# Altium PCB PCB.PcbDoc
Units mil, origin at the board's own origin, x right, y up, seen from the top; angles counter-clockwise.
Board outline 3935 x 3935 mil, 4 copper layers (Top Layer, GNDL, PWRL, Bottom Layer), stack 23.756 mil thick; 34 components, 78 nets, 340 pads, 278 vias.
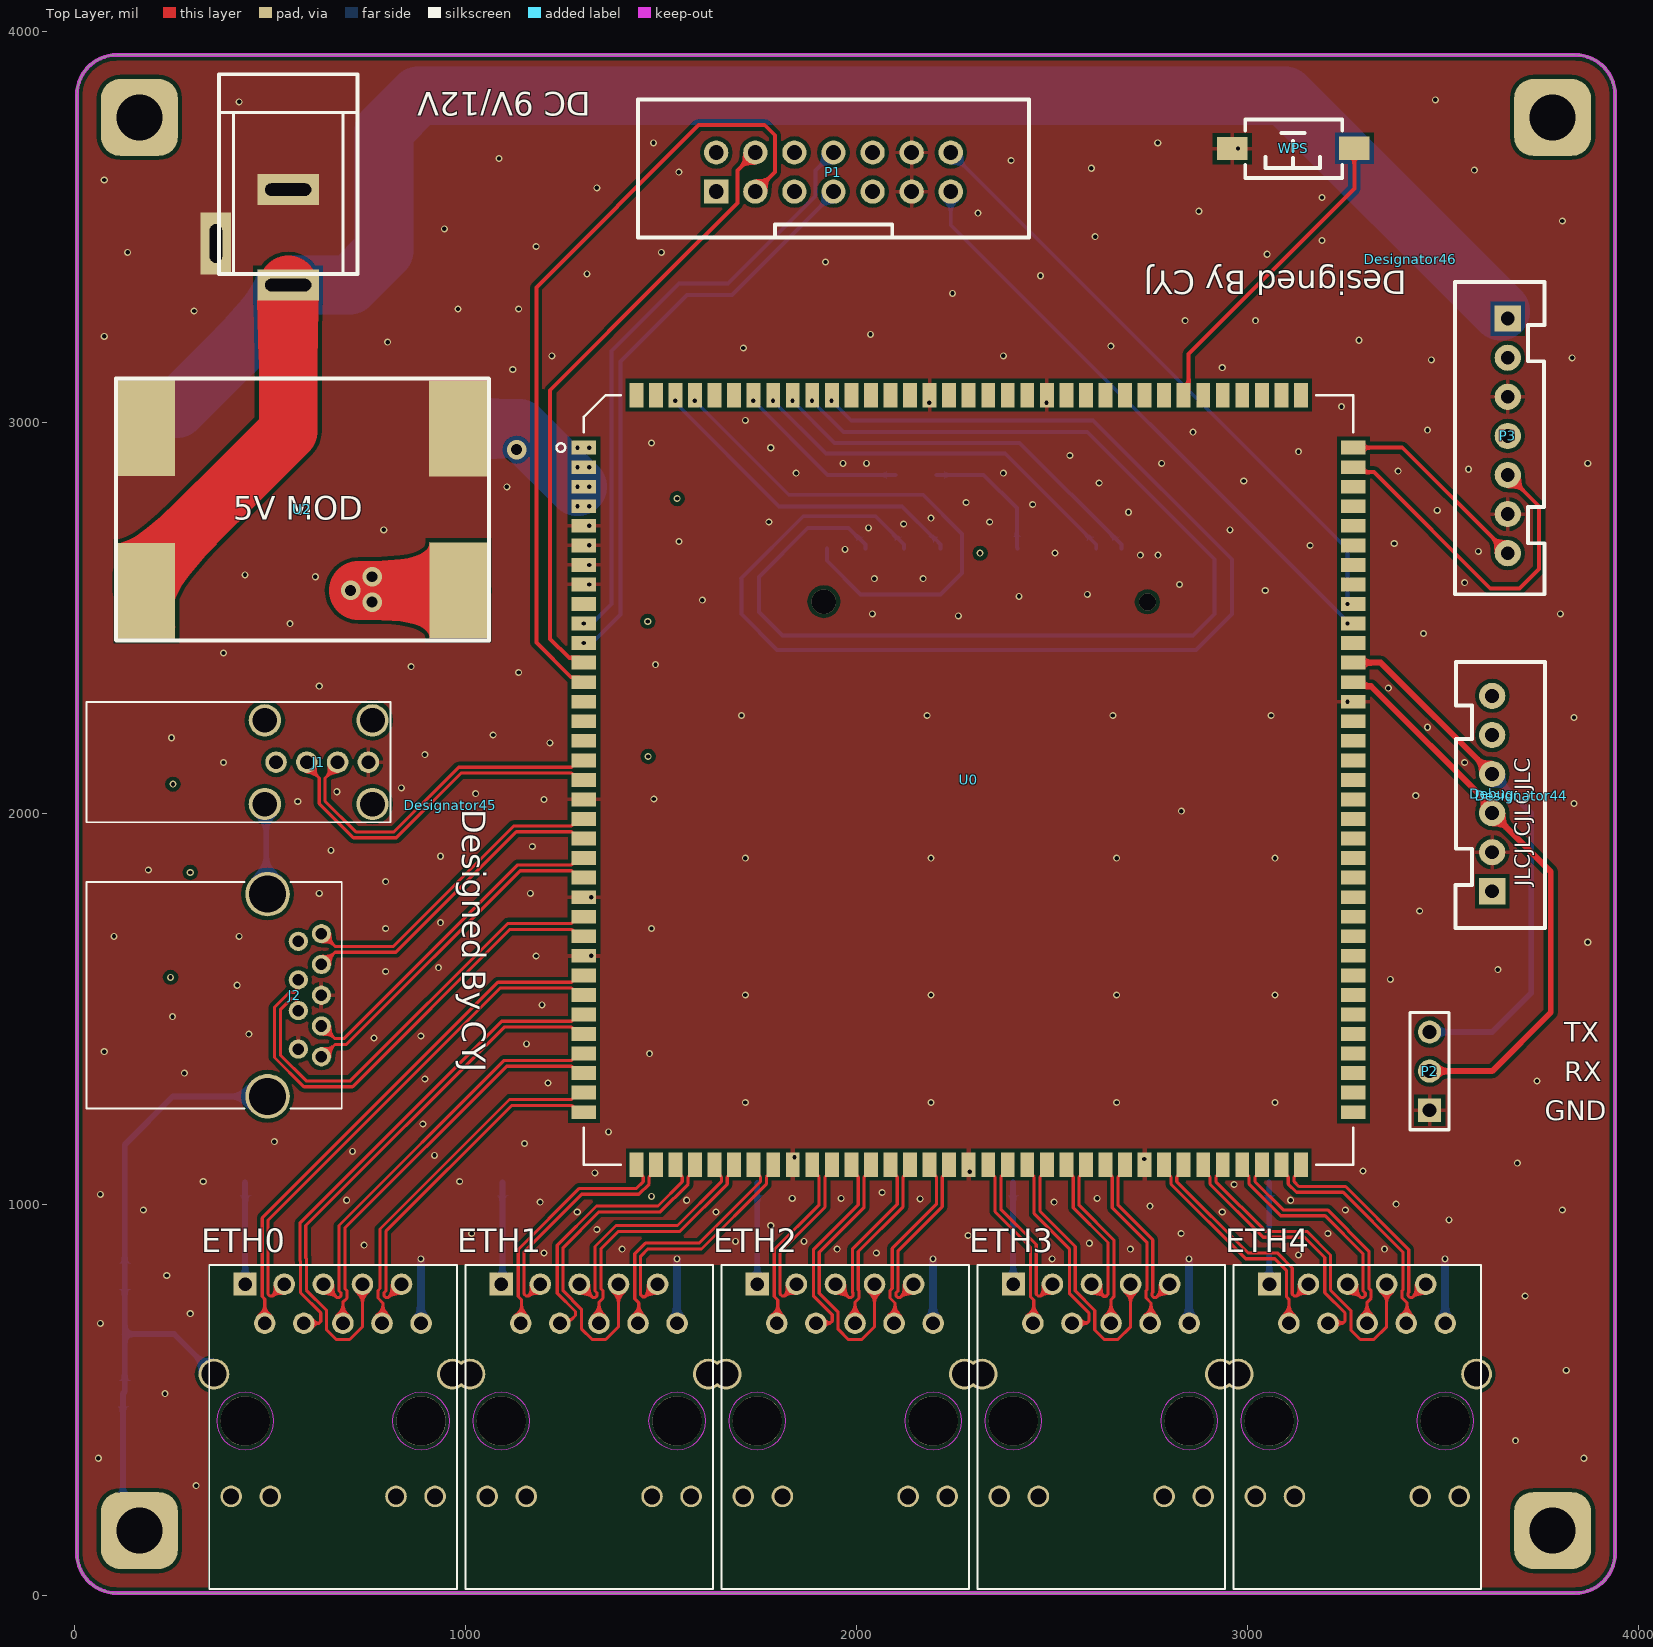
[diagram p0: Top Layer view]
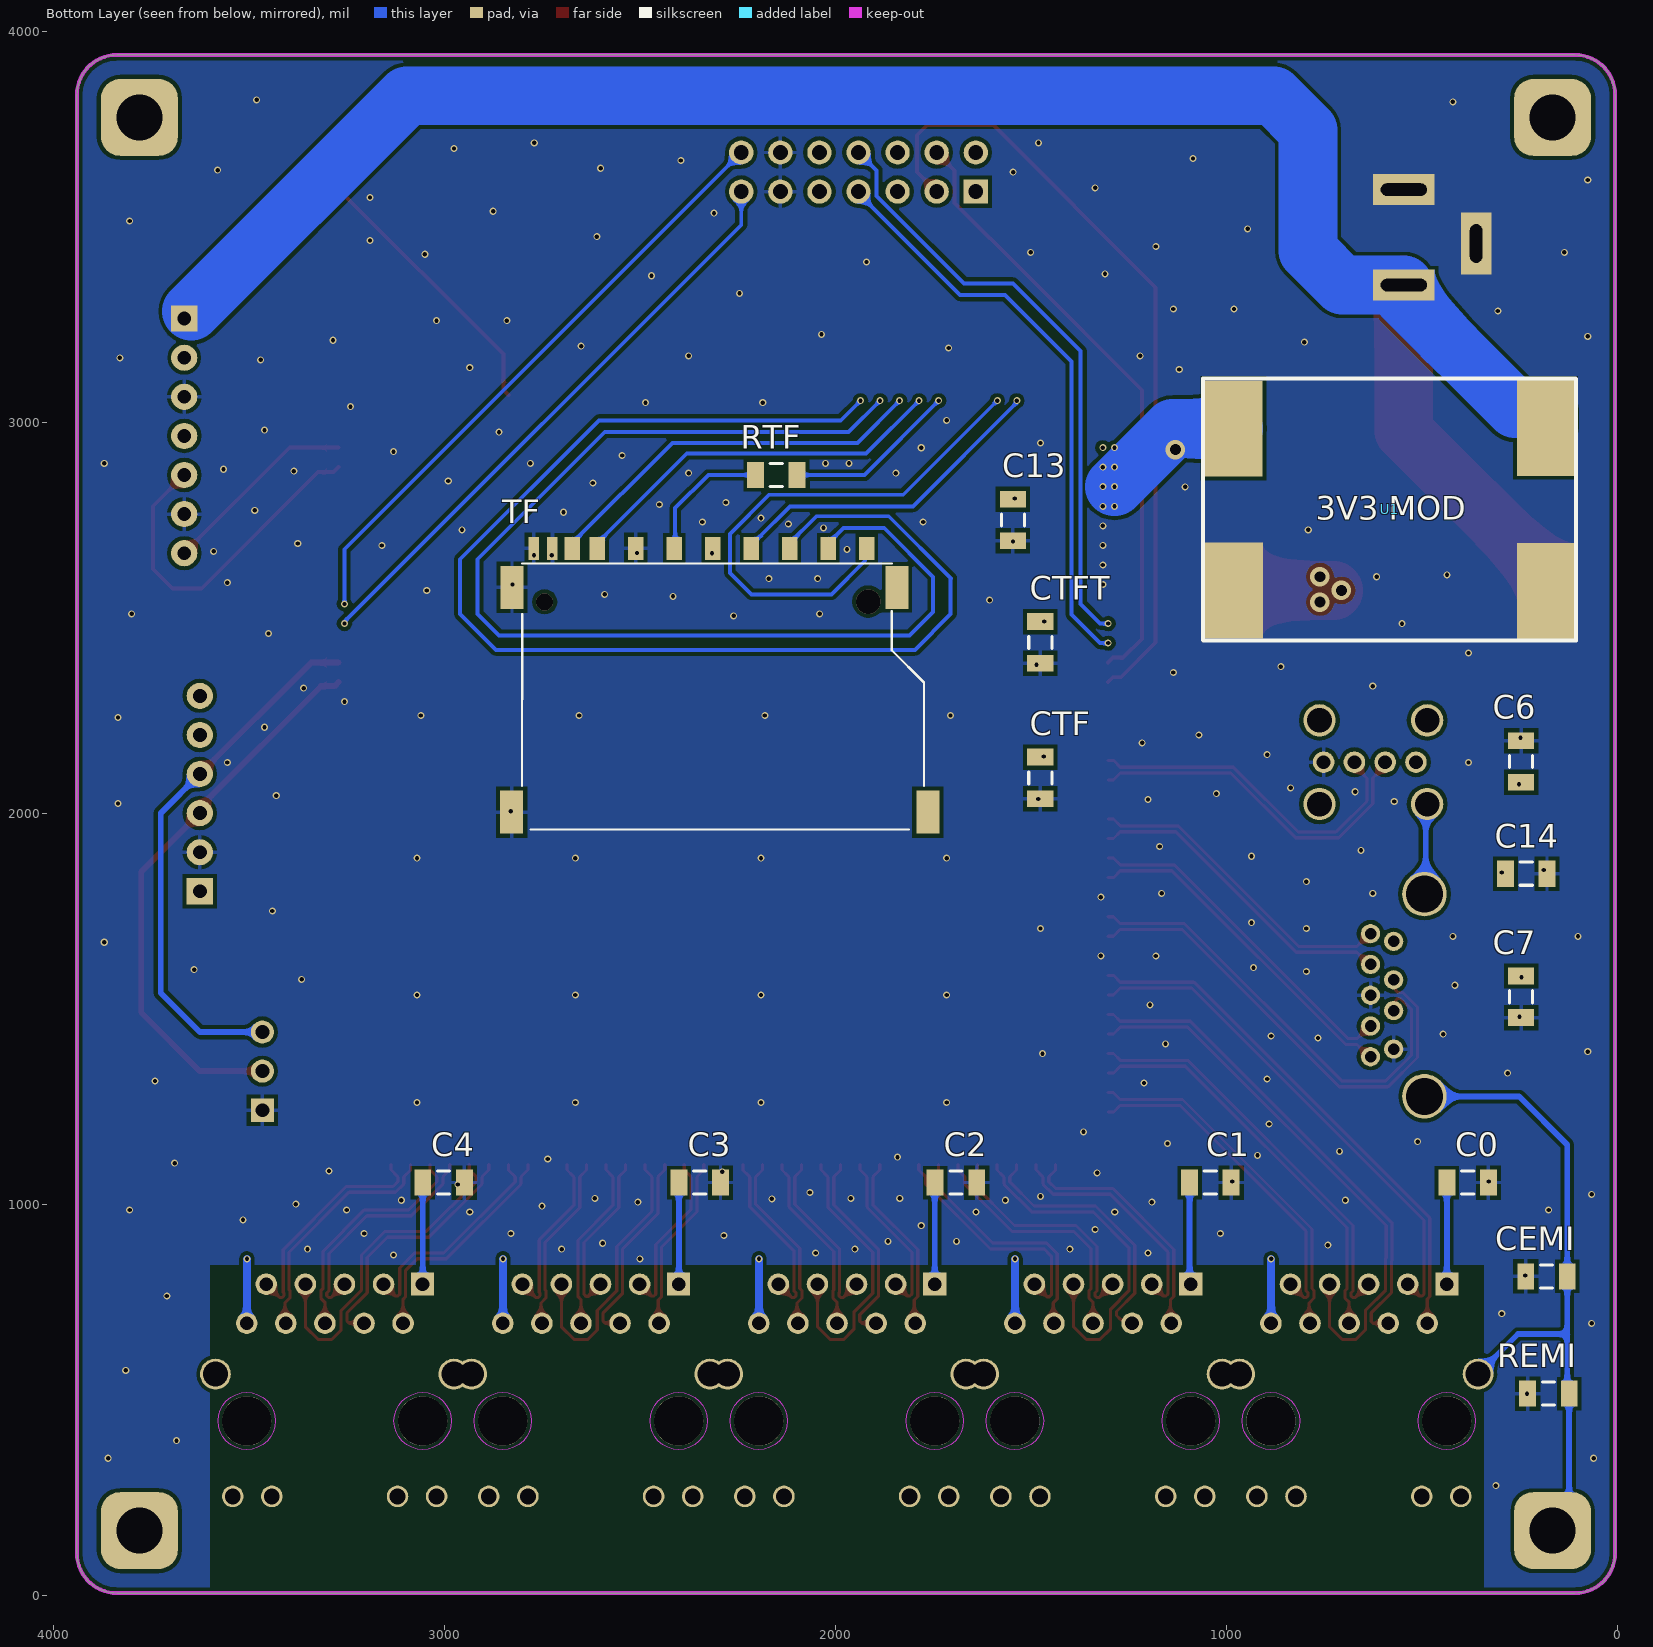
[diagram p1: Bottom Layer view, seen from below]
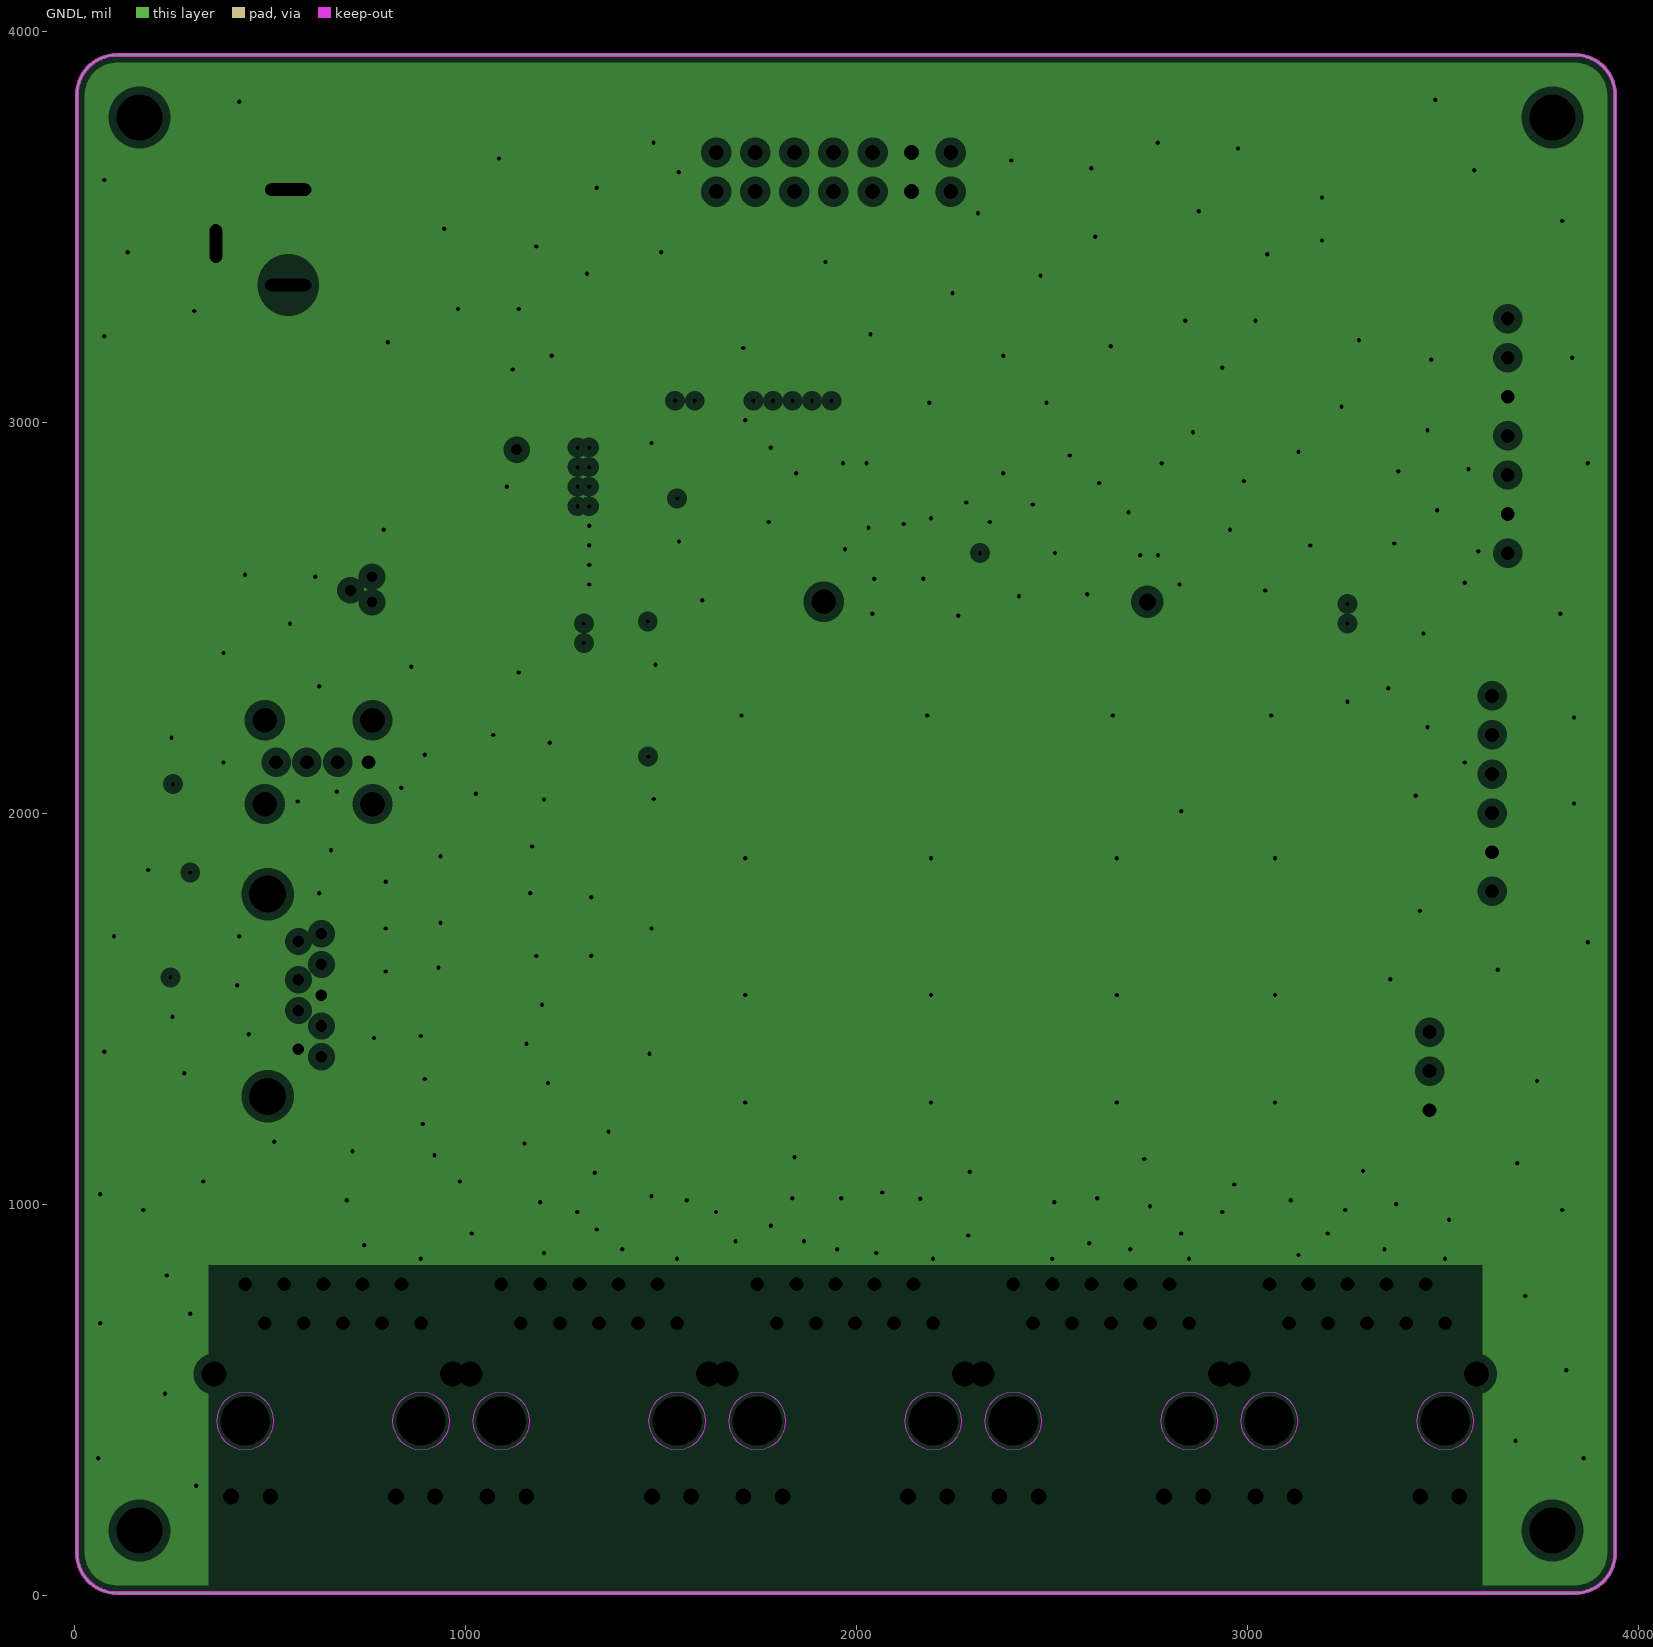
[diagram p2: GNDL, clearances drawn from the general rule]
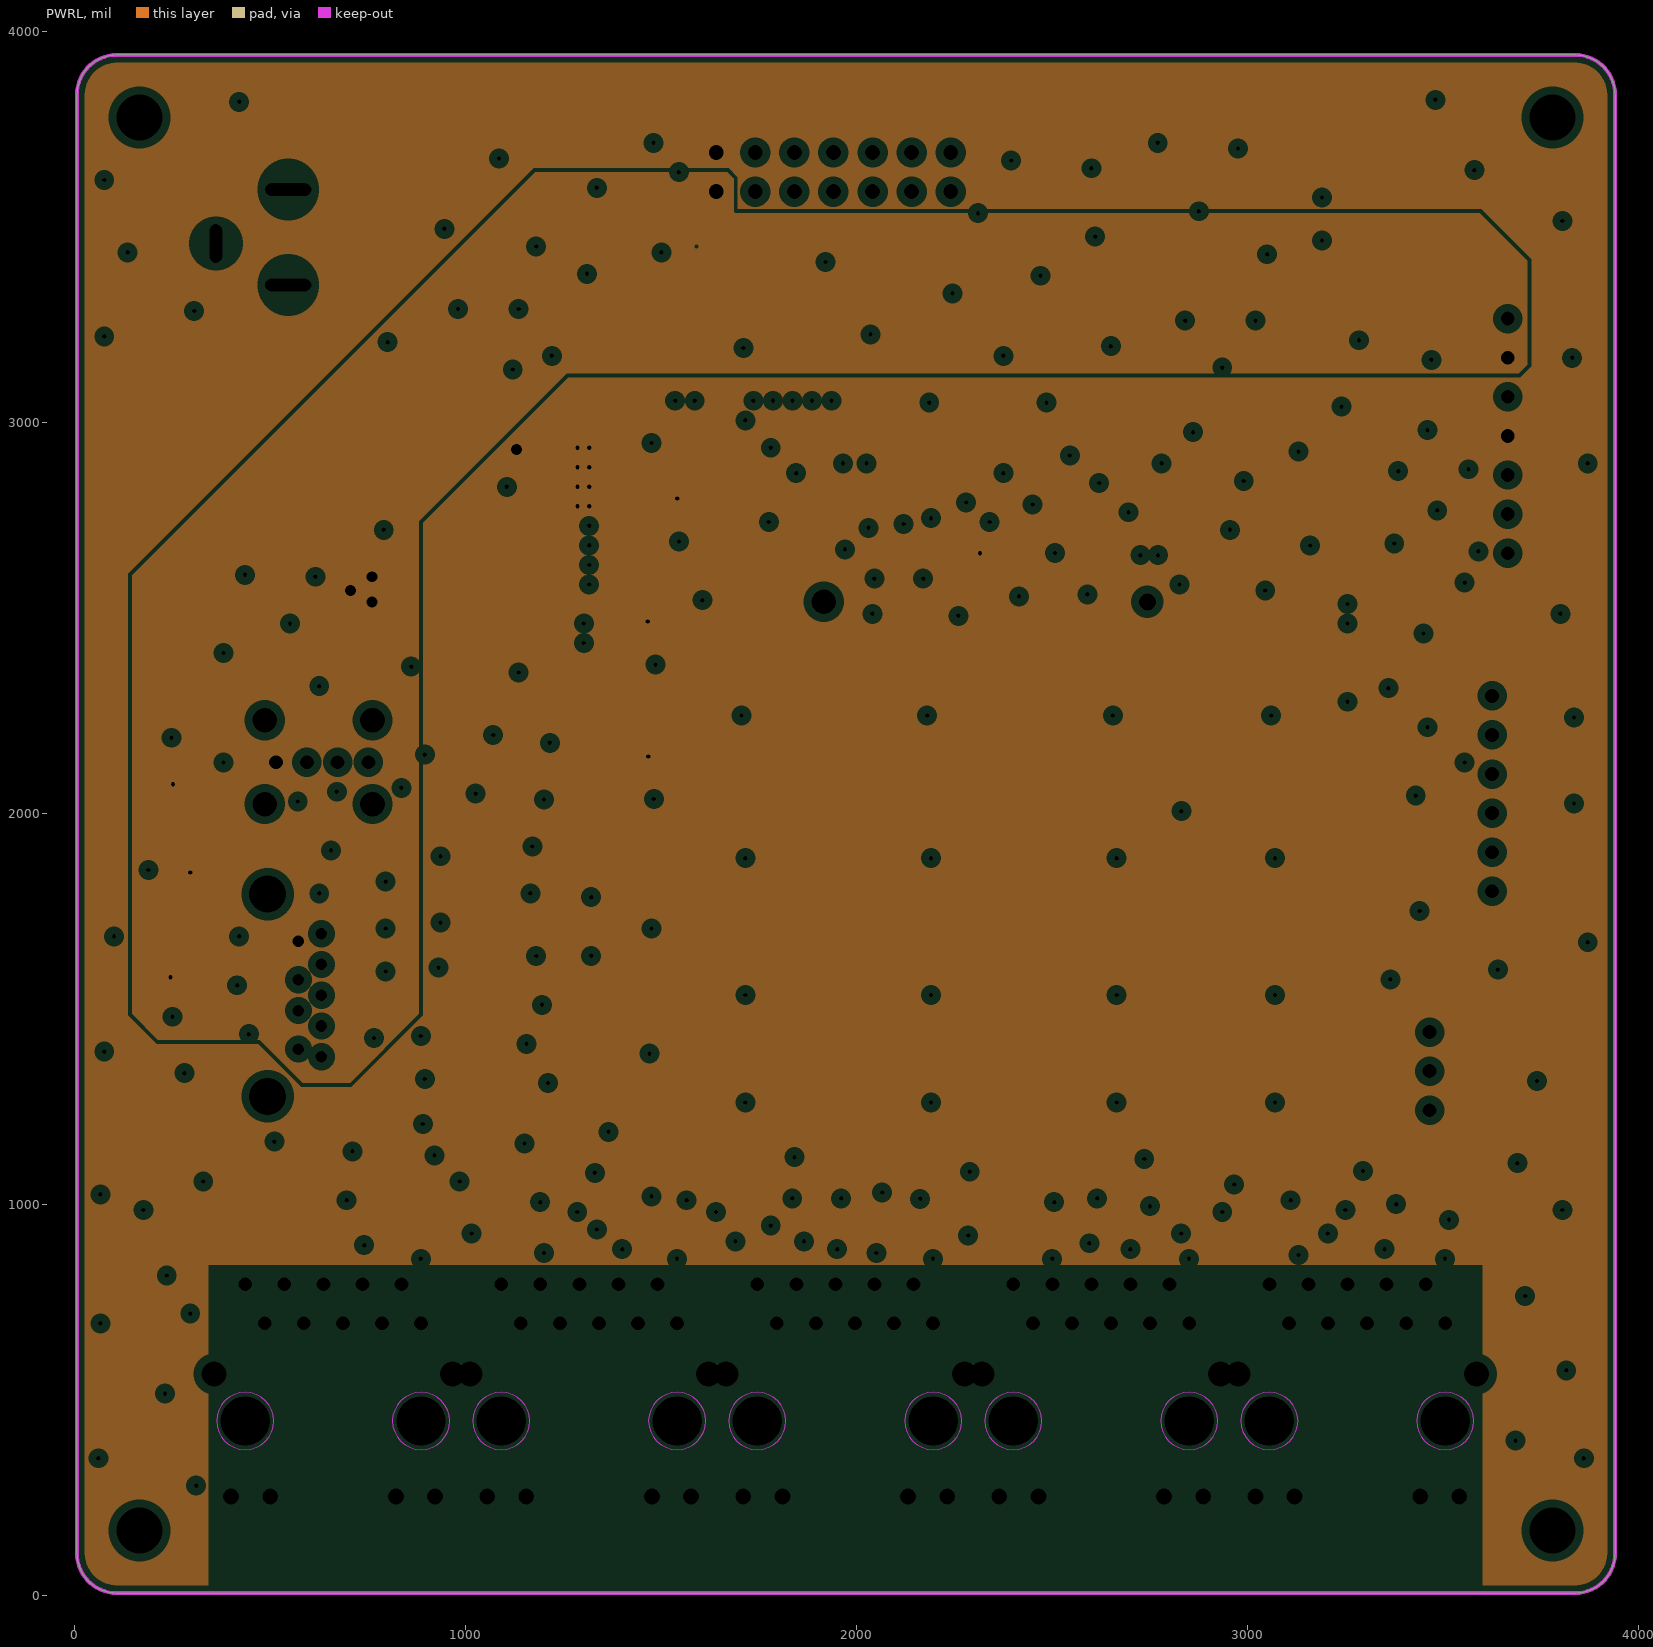
[diagram p3: PWRL, clearances drawn from the general rule]

## Layer stack, top to bottom
Top Solder: solder mask 0.4, Solder Resist, Dk 3.5
Top Layer: signal copper 1.4
Dielectric 2: prepreg 2.8, PP-006, Dk 4.1
GNDL: plane copper 1.378, net GND
Dielectric 1: dielectric 12.6, FR-4, Dk 4.8
PWRL: plane copper 1.378, net (Multiple Nets)
Dielectric 3: prepreg 2.8, PP-006, Dk 4.1
Bottom Layer: signal copper 1.4
Bottom Solder: solder mask 0.4, Solder Resist, Dk 3.5

## Board outline
5,107.43 5,3837.57 cw(c107.43,3837.57) 107.43,3940 3837.57,3940 cw(c3837.57,3837.57) 3940,3837.57 3940,107.43 cw(c3837.57,107.43) 3837.57,5 107.43,5 cw(c107.43,107.43)

## Design rules (kind name [scope] priority, off if disabled: settings)
Clearance [All] p1: gap=10 ignorepadtopadclearanceinfootprint=FALSE except(0: Arc-Hole Track-Hole SMDPad-Hole THPad-Hole Via-Hole Fill-Hole Poly-Hole Region-Hole Text-Hole; 7: Arc-Arc Arc-Track Track-Track)
ComponentClearance ComponentClearance_1 [HasFootprint('RJ45_HR911130')] p1: gap=0 collisioncheckmode=3 verticalgap=0 showdistances=FALSE
ComponentClearance [InComponent('U0') vs InComponent('TF')] p2: gap=0 collisioncheckmode=3 verticalgap=0 showdistances=FALSE
DiffPairsRouting [All] p1: maxlimit=10 minlimit=7 mostfreqgap=7 toplayer_minwidth=8 toplayer_maxwidth=15 toplayer_prefwidth=8 bottomlayer_minwidth=8 bottomlayer_maxwidth=15 bottomlayer_prefwidth=8 maxuncoupledlength=500
PlaneClearance [All] p1: clearance=20
PlaneConnect [All] p1: planeconnectstyle=Direct reliefexpansion=20 reliefentries=4 reliefconductorwidth=10 reliefairgap=10
PolygonConnect PolygonConnect_2 [HasFootprint('DC-005')] p1: connectstyle=Direct reliefconductorwidth=10 reliefentries=4 polygonreliefangle="90 Angle" airgapwidth=10
PolygonConnect PolygonConnect_1 [HasFootprint('MP1584EN_MOD')] p2: connectstyle=Direct reliefconductorwidth=10 reliefentries=4 polygonreliefangle="90 Angle" airgapwidth=10
PolygonConnect [All] p3: thpad.connectstyle=Relief thpad.reliefconductorwidth=10 thpad.reliefentries=4 thpad.polygonreliefangle="90 Angle" thpad.airgapwidth=10 smdpad.connectstyle=Relief smdpad.reliefconductorwidth=10 smdpad.reliefentries=4 smdpad.polygonreliefangle="90 Angle" smdpad.airgapwidth=10 via.connectstyle=Direct via.reliefconductorwidth=10 via.reliefentries=4 via.polygonreliefangle="90 Angle" via.airgapwidth=10
RoutingVias [All] p1: holewidth=28 width=50 viastyle="Through Hole" minholewidth=28 minwidth=50 maxholewidth=28 maxwidth=50
SolderMaskExpansion [All] p1: expansion=4 istentingtop=FALSE
Width [All] p1: maxlimit=1000 minlimit=7 preferedwidth=10 minimp=50.000000 maximp=50.000000 favimp=50.000000
26 further rules are at their usual default settings.

## Classes and differential pairs
component class Sheet: C0 C1 C2 C3 C4 C6 C7 C13 C14 CEMI CTF CTFT "DC 9V/12V" Debug ETH0 ETH1 ETH2 ETH3 ETH4 J1 J2 P1 P2 P3 REMI RTF TF U0 WPS
differential pair USB3D: +USB3D_P -USB3D_N
differential pair USB3_SST: +USB3_SST_P -USB3_SST_N
differential pair USB3_SSR: +USB3_SSR_P -USB3_SSR_N
differential pair USB2D: +USB2D_P -USB2D_N
differential pair ETH4_3: +ETH4_3_P -ETH4_3_N
differential pair ETH4_2: +ETH4_2_P -ETH4_2_N
differential pair ETH4_1: +ETH4_1_P -ETH4_1_N
differential pair ETH4_0: +ETH4_0_P -ETH4_0_N
differential pair ETH3_3: +ETH3_3_P -ETH3_3_N
differential pair ETH3_2: +ETH3_2_P -ETH3_2_N
differential pair ETH3_1: +ETH3_1_P -ETH3_1_N
differential pair ETH3_0: +ETH3_0_P -ETH3_0_N
differential pair ETH2_3: +ETH2_3_P -ETH2_3_N
differential pair ETH2_2: +ETH2_2_P -ETH2_2_N
differential pair ETH2_1: +ETH2_1_P -ETH2_1_N
differential pair ETH2_0: +ETH2_0_P -ETH2_0_N
differential pair ETH1_3: +ETH1_3_P -ETH1_3_N
differential pair ETH1_2: +ETH1_2_P -ETH1_2_N
differential pair ETH1_1: +ETH1_1_P -ETH1_1_N
differential pair ETH1_0: +ETH1_0_P -ETH1_0_N
differential pair ETH0_3: +ETH0_3_P -ETH0_3_N
differential pair ETH0_2: +ETH0_2_P -ETH0_2_N
differential pair ETH0_1: +ETH0_1_P -ETH0_1_N
differential pair ETH0_0: +ETH0_0_P -ETH0_0_N

## Components (designator, comment, footprint, x,y, rotation, side; value= is the part's Value field where it differs from the comment)
C0 "Cap" My1206 382.35,1055.3 r180 bottom value=0.1uF
C1 "Cap" My1206 1040.21,1055.3 r0 bottom value=0.1uF
C2 "Cap" My1206 1691.2,1055.3 r180 bottom value=0.1uF
C3 "Cap" My1206 2346.71,1055.3 r180 bottom value=0.1uF
C4 "Cap" My1206 3002.11,1055.3 r180 bottom value=0.1uF
C6 "Cap" My1206 245.5,2132.38 r90 bottom value=0.1uF
C7 "Cap" My1206 245.5,1530.3 r270 bottom value=22uF
C13 "Cap" My1206 1545.5,2750.17 r90 bottom value=0.1uF
C14 "Cap" My1206 232.35,1845.3 r180 bottom value=22uF
CEMI "Cap" My1206 180.5,815.3 r180 bottom value=0.1uF
CTF "Cap" My1206 1475.5,2090.3 r270 bottom value=0.1uF
CTFT "Cap" My1206 1475.5,2436.89 r270 bottom value=22u
"DC 9V/12V" "DC005" DC-005 545.5,3595.3 r90 top (schematic designator "DC 12V")
Debug "8266DebugPort" XH2.54-LI-6P 3625.5,2050.3 r90 top
Designator44 "Comment" JLC_CLI_NO 3700.5,2045.3 r90 top
Designator45 "Comment" DesignedByCYJ 960.5,2020.3 r270 top
Designator46 "Comment" DesignedByCYJ 3416.58,3417.46 r180 top
ETH0 "RJ45_HR911130" RJ45_HR911130 435.5,445.3 r180 top
ETH1 "RJ45_HR911130" RJ45_HR911130 1090.5,445.3 r180 top
ETH2 "RJ45_HR911130" RJ45_HR911130 1745.5,445.3 r180 top
ETH3 "RJ45_HR911130" RJ45_HR911130 2400.5,445.3 r180 top
ETH4 "RJ45_HR911130" RJ45_HR911130 3055.52,445.3 r180 top
J1 "USB2.0" USB2.0 514.47,2130.54 r270 top
J2 "USB3.0" USB3.0_0 571.55,1672.28 r270 top
P1 "Header 7X2" IDC3-7*2 1640.5,3590.3 r0 top
P2 "Header 3" HDR1X3 3465.5,1240.3 r90 top
P3 "Header 7" XH2.54-LI-7P 3665.5,2965.3 r270 top
REMI "Res2" My1206 175.5,515.3 r180 bottom value=1M
RTF "Res2" My1206 2150.5,2865.3 r0 bottom value=1R
TF "TF_Socket" TF_Socket 2295.5,2340.3 r180 bottom
U0 "MT7621A" HLK7621 1302,2935.3 r0 top locked
U1 "MP1584EN_MOD" MP1584EN_MOD 1058.74,3071.97 r180 bottom
U2 "MP1584EN_MOD" MP1584EN_MOD 1058.74,2482.4 r180 top
WPS "SW-PB" "TSW SMD-3*6*2.5" 3115.5,3700.3 r180 top

## Footprints (in the part's own frame and the unit in brackets; to place one, negate y for a bottom-side part, rotate by r counter-clockwise, add the part's x,y. Pads: shape width x height; smd on the part's side, far side on the other; paste and mask are expansions set on the pad)
DC-005 [mm] "5.5*2.1mm，DC30V,2.5A"
  rect 2x4 hole 0.8 slot 3 at 90 deg: 1(-6.2,0) 2(0,0)
  rect 4x2 hole 0.8 slot 2.5 at 0 deg: 3(-3.5,4.7)
  silkscreen extent -5.48,-4.5 7.5,4.5, body extent -6.55,-4.5 7.5,4.8, height 11.2
DesignedByCYJ [mil]
HDR1X3 [mm] "Connector; Header; 3 Position"
  rect 1.5x1.5 hole 0.9: 1(0,0)
  round 1.5 hole 0.9: 2(2.54,0) 3(5.08,0)
  silkscreen extent -1.27,-1.27 6.35,1.27
HLK7621 [mm]
  rect 1.6x0.9 smd: 1(0,0) 2(0,-1.27) 3(0,-2.54) 4(0,-3.81) 5(0,-5.08) 6(0,-6.35) 7(0,-7.62) 8(0,-8.89) 9(0,-10.16) 10(0,-11.43) 11(0,-12.7) 12(0,-13.97) 13(0,-15.24) 14(0,-16.51) 15(0,-17.78) 16(0,-19.05) 17(0,-20.32) 18(0,-21.59) 19(0,-22.86) 20(0,-24.13) 21(0,-25.4) 22(0,-26.67) 23(0,-27.94) 24(0,-29.21) 25(0,-30.48) 26(0,-31.75) 27(0,-33.02) 28(0,-34.29) 29(0,-35.56) 30(0,-36.83) 31(0,-38.1) 32(0,-39.37) 33(0,-40.64) 34(0,-41.91) 35(0,-43.18) 71(50,-43.18) 72(50,-41.91) 73(50,-40.64) 74(50,-39.37) 75(50,-38.1) 76(50,-36.83) 77(50,-35.56) 78(50,-34.29) 79(50,-33.02) 80(50,-31.75) 81(50,-30.48) 82(50,-29.21) 83(50,-27.94) 84(50,-26.67) 85(50,-25.4) 86(50,-24.13) 87(50,-22.86) 88(50,-21.59) 89(50,-20.32) 90(50,-19.05) 91(50,-17.78) 92(50,-16.51) 93(50,-15.24) 94(50,-13.97) 95(50,-12.7) 96(50,-11.43) 97(50,-10.16) 98(50,-8.89) 99(50,-7.62) 100(50,-6.35) 101(50,-5.08) 102(50,-3.81) 103(50,-2.54) 104(50,-1.27) 105(50,0)
  rect 0.9x1.6 smd: 36(3.41,-46.59) 37(4.68,-46.59) 38(5.95,-46.59) 39(7.22,-46.59) 40(8.49,-46.59) 41(9.76,-46.59) 42(11.03,-46.59) 43(12.3,-46.59) 44(13.57,-46.59) 45(14.84,-46.59) 46(16.11,-46.59) 47(17.38,-46.59) 48(18.65,-46.59) 49(19.92,-46.59) 50(21.19,-46.59) 51(22.46,-46.59) 52(23.73,-46.59) 53(25,-46.59) 54(26.27,-46.59) 55(27.54,-46.59) 56(28.81,-46.59) 56(28.81,-46.59) 57(30.08,-46.59) 58(31.35,-46.59) 59(32.62,-46.59) 60(33.89,-46.59) 61(35.16,-46.59) 62(36.43,-46.59) 63(37.7,-46.59) 64(38.97,-46.59) 65(40.24,-46.59) 66(41.51,-46.59) 67(42.78,-46.59) 68(44.05,-46.59) 69(45.32,-46.59) 70(46.59,-46.59) 106(46.59,3.41) 107(45.32,3.41) 108(44.05,3.41) 109(42.78,3.41) 110(41.51,3.41) 111(40.24,3.41) 112(38.97,3.41) 113(37.7,3.41) 114(36.43,3.41) 115(35.16,3.41) 116(33.89,3.41) 117(32.62,3.41) 118(31.35,3.41) 119(30.08,3.41) 120(28.81,3.41) 121(27.54,3.41) 122(26.27,3.41) 123(25,3.41) 124(23.73,3.41) 125(22.46,3.41) 126(21.19,3.41) 127(19.92,3.41) 128(18.65,3.41) 129(17.38,3.41) 130(16.11,3.41) 131(14.84,3.41) 132(13.57,3.41) 133(12.3,3.41) 134(11.03,3.41) 135(9.76,3.41) 136(8.49,3.41) 137(7.22,3.41) 138(5.95,3.41) 139(4.68,3.41) 140(3.41,3.41)
  silkscreen extent -1.78,-46.59 50,3.41
IDC3-7*2 [mil]
  rect 62x62 hole 38: 1(0,0)
  round 62 hole 38: 2(0,100) 3(100,0) 4(100,100) 5(200,0) 6(200,100) 7(300,0) 8(300,100) 9(400,0) 10(400,100) 11(500,0) 12(500,100) 13(600,0) 14(600,100)
  silkscreen extent -200,-117 800,235, body extent -198,-122 802,232, height 354
JLC_CLI_NO [mil]
MP1584EN_MOD [mm]
  rect 3.75x6.25 smd paste+0 mask+0: 1(1.975,-2.225) 2(2,-12.75) 3(22.25,-2.175) 4(22.25,-12.8)
  silkscreen extent 0,-16 24.23,1.02
My1206 [mm]
  rect 1.1x1.7 smd: 1(-1.35,0) 2(1.35,0)
  silkscreen extent -0.4,-0.75 0.4,0.75
RJ45_HR911130 [mm]
  rect 1.5x1.5 hole 0.9: 1(0,-8.89)
  round 1.4 hole 0.9: 2(-1.27,-6.35) 3(-2.54,-8.89) 4(-3.81,-6.35) 5(-5.08,-8.89) 6(-6.35,-6.35) 7(-7.62,-8.89) 8(-8.89,-6.35) 9(-10.16,-8.89) 10(-11.43,-6.35)
  round 1.4 hole 1.03: 11(0.91,4.9) 12(-1.63,4.9) 13(-9.8,4.9) 14(-12.34,4.9)
  round 2 hole 1.63: ""(-13.46,-3.05)
  round 3.2 hole 3.2 unplated: ""(-11.43,0) ""(0,0)
  round 2 hole 1.63 unplated: ""(2.03,-3.05)
  Keep-Out Layer pour cut-out: -1.863,0 -1.827,-0.363 -1.721,-0.713 -1.549,-1.035 -1.317,-1.317 -1.035,-1.549 -0.713,-1.721 -0.363,-1.827 0,-1.863 0.363,-1.827 0.713,-1.721 1.035,-1.549 1.317,-1.317 1.549,-1.035 1.721,-0.713 1.827,-0.363 1.863,0 1.827,0.363 1.721,0.713 1.549,1.035 1.317,1.317 1.035,1.549 0.713,1.721 0.363,1.827 0,1.863 -0.363,1.827 -0.713,1.721 -1.035,1.549 -1.317,1.317 -1.549,1.035 -1.721,0.713 -1.827,0.363
  Keep-Out Layer pour cut-out: -13.293,0 -13.257,-0.363 -13.151,-0.713 -12.979,-1.035 -12.747,-1.317 -12.465,-1.549 -12.143,-1.721 -11.793,-1.827 -11.43,-1.863 -11.067,-1.827 -10.717,-1.721 -10.395,-1.549 -10.113,-1.317 -9.881,-1.035 -9.709,-0.713 -9.603,-0.363 -9.567,0 -9.603,0.363 -9.709,0.713 -9.881,1.035 -10.113,1.317 -10.395,1.549 -10.717,1.721 -11.067,1.827 -11.43,1.863 -11.793,1.827 -12.143,1.721 -12.465,1.549 -12.747,1.317 -12.979,1.035 -13.151,0.713 -13.257,0.363
  silkscreen extent -13.76,-10.15 2.33,10.92
TF_Socket [mm] "关注智芯Player公众号获取更多知识"
  rect 1x1.5 smd: 1(7.051,8.57) 2(4.551,8.57) 3(2.051,8.57) 4(-0.449,8.57) 5(-2.949,8.57) 6(-5.449,8.57) 7(-7.949,8.57) 8(-9.579,8.57) 9(9.551,8.57)
  rect 0.7x1.5 smd: 10(-10.879,8.57) 11(-12.079,8.57)
  rect 1.5x2.8 smd: 12(-13.499,6.03) 13(-13.524,-8.57) 14(13.524,-8.57) 15(11.52,6.03)
  silkscreen extent -12.85,-9.69 13.28,7.59, body extent -13.69,-9.5 13.96,8.5, height 3.42
"TSW SMD-3*6*2.5" [mm] "3*6*2.5mm"
  rect 2x1.5 smd: 1(-3.996,-0.02) 2(3.937,0)
  silkscreen extent -3.21,-1.9 3.09,1.9, body extent -4,-1.88 4,1.62, height 2.59
USB2.0 [mm]
  round 1.4 hole 0.9: 1(0,0) 2(0,2) 3(0,4) 4(0,6)
  round 2.1 hole 1.6: 5(2.72,-0.73) 6(-2.72,-0.73) 7(2.72,6.27) 8(-2.72,6.27)
  silkscreen extent -3.9,-12.33 3.9,7.44
USB3.0_0 [mm]
  round 1.25 hole 0.75: 1(0,0) 2(2.5,0) 3(4.5,0) 4(7,0) 5(7.5,1.5) 6(5.5,1.5) 7(3.5,1.5) 8(1.5,1.5) 9(-0.5,1.5)
  round 2.9 hole 2.4: 10(-3.07,-2) 11(10.07,-2)
  silkscreen extent -3.85,-13.78 10.85,2.82
XH2.54-LI-6P [mm] "接插件，6P"
  rect 1.7x1.7 hole 0.9: 1(-6.35,0)
  round 1.7 hole 0.9: 2(-3.81,0) 3(-1.27,0) 4(1.27,0) 5(3.81,0) 6(6.35,0)
  silkscreen extent -8.74,-3.43 8.56,2.39, body extent -8.85,-3.3 8.85,2.4, height 7.03
XH2.54-LI-7P [mm] "接插件，7P"
  rect 1.7x1.7 hole 0.9: 1(-7.62,0)
  round 1.7 hole 0.9: 2(-5.08,0) 3(-2.54,0) 4(0,0) 5(2.54,0) 6(5.08,0) 7(7.62,0)
  silkscreen extent -10.01,-3.43 10.29,2.39, body extent -10.12,-3.3 10.12,2.4, height 7.05

## Part data
C0 C1 C2 C3 C4 C6 C7 C13 C14 CEMI CTF CTFT: "Capacitor", LatestRevisionDate=17-Jul-2002, LatestRevisionNote="Re-released for DXP Platform.", PackageDescription="Radial Cap, Thru-Hole; 2 Leads; 0.3 in Pin Spacing", PackageReference=RAD-0.3, Published=8-Jun-2000, Publisher="Altium Limited"
P1: "Header, 7-Pin, Dual row", LatestRevisionDate=17-Jul-2002, LatestRevisionNote="Re-released for DXP Platform.", Publisher="Altium Limited"
P2: "Header, 3-Pin", LatestRevisionDate=17-Jul-2002, LatestRevisionNote="Re-released for DXP Platform.", Publisher="Altium Limited"
P3: "Header, 7-Pin", LatestRevisionDate=17-Jul-2002, LatestRevisionNote="Re-released for DXP Platform.", Publisher="Altium Limited"
REMI RTF: "Resistor", LatestRevisionDate=17-Jul-2002, LatestRevisionNote="Re-released for DXP Platform.", PackageDescription="Axial Device, Thru-Hole; 2 Leads; 0.4 in Pin Spacing", PackageReference=AXIAL-0.4, Published=8-Jun-2000, Publisher="Altium Limited"
WPS: "Switch", LatestRevisionDate=17-Jul-2002, LatestRevisionNote="Re-released for DXP Platform.", PackageDescription="Switch; 2 Leads", PackageReference=SPST-2, Published=24-Mar-1999, Publisher="Altium Limited"

## Free pads (board coordinates)
  rrect50% 196.85x196.85 hole 118.11: 1(165,3780) 2(3780,3780) 3(3780,165) 4(165,165)

## Via types
v1: diameter 18, hole 11, Top Layer to Bottom Layer, tented both sides, 220 vias
v2: diameter 18, hole 11, Top Layer to Bottom Layer, tented bottom, 29 vias
v3: diameter 18, hole 11, Top Layer to Bottom Layer, tented top, 22 vias
v4: diameter 50, hole 28, Top Layer to Bottom Layer, 3 vias
v5: diameter 50, hole 28, Top Layer to Bottom Layer, tented both sides, 1 vias
v6: diameter 18, hole 11, Top Layer to Bottom Layer, 1 vias
v7: diameter 62.99, hole 62.99, Top Layer to Bottom Layer, 1 vias
v8: diameter 43.31, hole 43.31, Top Layer to Bottom Layer, 1 vias

## Nets (pads, with @x,y where several pads share a name; then routed paths per layer and width w, separated by ;. In a path a pad name is that pad's centre, name@x,y a point inside that pad or via, vN(x,y) a via of type N, cw(c..) or ccw(c..) an arc to the next point about the centre after c; other vN are vias at no path point)
+5: C6.1 C7.1 C14.1 J1.1 J2.1 P1.1 P3.2 U2.1 | length 256
  Top Layer w150: v4@725,2570 U2.1
  other v3: 244.58,1580.19 294.98,1848.52 250.82,2074.53
  other v4: 760,2540 705,2570 760,2605
+12: "DC 9V/12V.1" P3.1 U1.3 U2.3 | length 5204.6
  Top Layer w150: U2.3 182.76,2614.88 545.5,2977.63 545.5,3351.2
  Bottom Layer w150: U1.3 182.76,3033.19 183.94,3034.37 260.56,3034.37 545.5,3319.31 545.5,3351.2 702.64,3351.2 790.5,3439.07 790.5,3747.43 878.37,3835.3 3095.5,3835.3 P3.1@3647.04,3283.76
ETH0_0_N: ETH0.3 U0.29 | length 1306.2
  Top Layer w8: ETH0.3 505.35,765.14 498.72,765.14 494.03,769.83 494.03,958.83 1088,1552.8 1270.72,1552.8 1288.22,1535.3 U0.29
ETH0_0_P: ETH0.2 U0.28 | length 1352.3
  Top Layer w8: ETH0.2 485.5,757.14 479.03,763.61 479.03,965.04 1081.79,1567.8 1270.72,1567.8 1288.22,1585.3 U0.28
ETH0_1_N: ETH0.7 U0.31 | length 1442.3
  Top Layer w8: ETH0.7 735.5,686.52 702.72,653.74 668.29,653.74 643.94,678.08 643.94,728.08 592.06,779.97 592.06,861.24 590.5,862.8 590.5,945.3 1098,1452.8 1270.72,1452.8 1288.22,1435.3 U0.31
ETH0_1_P: ETH0.4 U0.30 | length 1266.6
  Top Layer w8: ETH0.4 624.26,695.3 628.94,699.98 628.94,721.87 577.06,773.75 577.06,855.03 575.5,856.58 575.5,951.51 1091.79,1467.8 1270.72,1467.8 1288.22,1485.3 U0.30
ETH0_2_N: ETH0.6 U0.33 | length 1040.4
  Top Layer w8: ETH0.6 685.5,749.34 695.88,759.71 695.88,778.76 690.5,784.14 690.5,939.08 1104.22,1352.8 1270.72,1352.8 1288.22,1335.3 U0.33
ETH0_2_P: ETH0.5 U0.32 | length 1051.8
  Top Layer w8: ETH0.5 669.56,761.24 676.19,761.24 680.88,765.92 680.88,772.55 675.5,777.93 675.5,945.3 1098,1367.8 1270.72,1367.8 1288.22,1385.3 U0.32
ETH0_3_N: ETH0.9 U0.35 | length 875.2
  Top Layer w8: ETH0.9 801.49,761.29 794.87,761.29 790.18,765.97 790.18,772.6 795.5,777.93 795.5,930.3 1118,1252.8 1270.72,1252.8 1288.22,1235.3 U0.35
ETH0_3_P: ETH0.8 U0.34 | length 915.6
  Top Layer w8: ETH0.8 787.81,697.61 787.81,747.13 775.18,759.76 775.18,778.81 780.5,784.14 780.5,936.51 1111.79,1267.8 1270.72,1267.8 1288.22,1285.3 U0.34
ETH1_0_N: ETH1.3 U0.37 | length 612.5
  Top Layer w8: ETH1.3 1160.35,765.14 1153.72,765.14 1149.03,769.83 1149.03,877.83 1296.5,1025.3 1442.71,1025.3 1468.75,1051.34 1468.75,1069.77 1486.25,1087.27 U0.37
ETH1_0_P: ETH1.2 U0.36 | length 635.7
  Top Layer w8: ETH1.2 1142.81,697.61 1142.81,754.83 1134.03,763.61 1134.03,884.04 1290.29,1040.3 1436.5,1040.3 1453.75,1057.55 1453.75,1069.77 1436.25,1087.27 U0.36
ETH1_1_N: ETH1.7 U0.39 | length 899.5
  Top Layer w8: ETH1.7 1390.5,686.52 1357.72,653.74 1323.29,653.74 1295.5,681.52 1295.5,731.52 1248.94,778.08 1248.94,888.74 1340.5,980.3 1497.71,980.3 1568.75,1051.34 1568.75,1069.77 1586.25,1087.27 U0.39
ETH1_1_P: ETH1.4 U0.38 | length 685.1
  Top Layer w8: ETH1.4 1249.52,704.31 1268.68,704.31 1269.64,705.27 1270.48,705.27 1280.5,715.3 1280.5,725.31 1233.94,771.87 1233.94,894.95 1334.29,995.3 1491.5,995.3 1553.75,1057.55 1553.75,1069.77 1536.25,1087.27 U0.38
ETH1_2_N: ETH1.6 U0.41 | length 645.5
  Top Layer w8: ETH1.6 1340.5,749.34 1350.88,759.71 1350.88,778.76 1345.5,784.14 1345.5,885.3 1390.5,930.3 1547.71,930.3 1668.75,1051.34 1668.75,1069.77 1686.25,1087.27 U0.41
ETH1_2_P: ETH1.5 U0.40 | length 632
  Top Layer w8: ETH1.5 1324.56,761.24 1331.19,761.24 1335.88,765.92 1335.88,772.55 1330.5,777.93 1330.5,891.51 1384.29,945.3 1541.5,945.3 1653.75,1057.55 1653.75,1069.77 1636.25,1087.27 U0.40
ETH1_3_N: ETH1.9 U0.43 | length 612.8
  Top Layer w8: ETH1.9 1458.38,763.17 1451.75,763.17 1447.06,767.86 1447.06,866.86 1465.5,885.3 1602.71,885.3 1768.75,1051.34 1768.75,1069.77 1786.25,1087.27 U0.43
ETH1_3_P: ETH1.8 U0.42 | length 631.6
  Top Layer w8: ETH1.8 1442.32,697.11 1442.32,747.52 1432.06,757.78 1432.06,873.07 1459.29,900.3 1596.5,900.3 1753.75,1057.55 1753.75,1069.77 1736.25,1087.27 U0.42
ETH2_0_N: ETH2.3 U0.46 | length 441.9
  Top Layer w8: ETH2.3 1815.35,765.14 1808.72,765.14 1804.03,769.83 1804.03,877.61 1918.75,992.33 1918.75,1069.77 1936.25,1087.27 U0.46
ETH2_0_P: ETH2.2 U0.45 | length 465.1
  Top Layer w8: ETH2.2 1797.81,697.61 1797.81,754.83 1789.03,763.61 1789.03,883.83 1903.75,998.55 1903.75,1069.77 1886.25,1087.27 U0.45
ETH2_1_N: ETH2.7 U0.48 | length 722.5
  Top Layer w8: U0.48 2036.25,1087.27 2018.75,1069.77 2018.75,992.05 1903.94,877.24 1903.94,771.86 1952.4,723.4 1952.4,679.63 1978.29,653.74 2012.72,653.74 2045.5,686.52 ETH2.7
ETH2_1_P: ETH2.4 U0.47 | length 519.4
  Top Layer w8: ETH2.4 1896.14,695.94 1932.71,695.94 1937.4,700.62 1937.4,717.19 1888.94,765.64 1888.94,883.46 2003.75,998.26 2003.75,1069.77 1986.25,1087.27 U0.47
ETH2_2_N: ETH2.6 U0.50 | length 465.6
  Top Layer w8: ETH2.6 1995.5,749.34 2005.88,759.71 2005.88,778.76 2003.94,780.7 2003.94,878.74 2118.75,993.55 2118.75,1069.77 2136.25,1087.27 U0.50
ETH2_2_P: ETH2.5 U0.49 | length 452.2
  Top Layer w8: ETH2.5 1979.56,761.24 1986.19,761.24 1990.88,765.92 1990.88,772.55 1988.94,774.48 1988.94,884.95 2103.75,999.76 2103.75,1069.77 2086.25,1087.27 U0.49
ETH2_3_N: ETH2.9 U0.52 | length 452.8
  Top Layer w8: ETH2.9 2111.49,761.29 2104.87,761.29 2100.18,765.97 2100.18,772.6 2105.94,778.37 2105.94,880.74 2218.75,993.55 2218.75,1069.77 2236.25,1087.27 U0.52
ETH2_3_P: ETH2.8 U0.51 | length 468.3
  Top Layer w8: ETH2.8 2097.81,697.61 2097.81,747.13 2085.18,759.76 2085.18,778.81 2090.94,784.58 2090.94,886.95 2203.75,999.76 2203.75,1069.77 2186.25,1087.27 U0.51
ETH3_0_N: ETH3.3 U0.55 | length 431.8
  Top Layer w8: U0.55 2386.25,1087.27 2368.75,1069.77 2368.75,987.05 2459.03,896.77 2459.03,769.83 2463.72,765.14 2470.35,765.14 ETH3.3
ETH3_0_P: ETH3.2 U0.54 | length 455
  Top Layer w8: U0.54 2336.25,1087.27 2353.75,1069.77 2353.75,980.84 2444.03,890.56 2444.03,763.61 2452.81,754.83 2452.81,697.61 ETH3.2
ETH3_1_N: ETH3.7 U0.57 | length 712.3
  Top Layer w8: U0.57 2486.25,1087.27 2468.75,1069.77 2468.75,982.05 2558.94,891.86 2558.94,778.08 2608.94,728.08 2608.94,678.08 2633.29,653.74 2667.72,653.74 2700.5,686.52 ETH3.7
ETH3_1_P: ETH3.4 U0.56 | length 511.4
  Top Layer w8: U0.56@2436.25,1101.05 2436.25,1087.27 2453.75,1069.77 2453.75,975.84 2543.94,885.64 2543.94,771.87 2593.94,721.87 2593.94,700.63 2589.26,695.94 2551.14,695.94 ETH3.4
ETH3_2_N: ETH3.6 U0.59 | length 452.8
  Top Layer w8: U0.59 2586.25,1087.27 2568.75,1069.77 2568.75,997.05 2657.67,908.13 2657.67,762.92 2650.5,755.75 ETH3.6
ETH3_2_P: ETH3.5 U0.58 | length 432.9
  Top Layer w8: U0.58 2536.25,1087.27 2553.75,1069.77 2553.75,990.84 2642.67,901.92 2642.67,769.13 2637.98,764.45 2631.36,764.45 ETH3.5
ETH3_3_N: ETH3.9 U0.61 | length 441
  Top Layer w8: U0.61 2686.25,1087.27 2668.75,1069.77 2668.75,997.05 2757.06,908.74 2757.06,774.48 2755.18,772.6 2755.18,765.97 2759.86,761.29 2766.49,761.29 ETH3.9
ETH3_3_P: ETH3.8 U0.60 | length 456.5
  Top Layer w8: U0.60 2636.25,1087.27 2653.75,1069.77 2653.75,990.84 2742.06,902.53 2742.06,780.7 2740.18,778.81 2740.18,759.76 2752.81,747.13 2752.81,697.61 ETH3.8
ETH4_0_N: ETH4.3 U0.64 | length 560.4
  Top Layer w8: U0.64 2836.25,1087.27 2818.75,1069.77 2818.75,1057.55 3001,875.3 3075.59,875.3 3114.05,836.84 3114.05,769.83 3118.74,765.14 3125.37,765.14 ETH4.3
ETH4_0_P: ETH4.2 U0.63 | length 581.7
  Top Layer w8: U0.63 2786.25,1087.27 2803.75,1069.77 2803.75,1051.34 2994.79,860.3 3069.38,860.3 3099.05,830.62 3099.05,763.61 3105.52,757.14 ETH4.2
ETH4_1_N: ETH4.7 U0.66 | length 859.1
  Top Layer w8: U0.66 2936.25,1087.27 2918.75,1069.77 2918.75,1057.55 3046,930.3 3151.72,930.3 3212.08,869.93 3212.08,779.97 3263.96,728.08 3263.96,678.08 3288.31,653.74 3322.74,653.74 3355.52,686.52 ETH4.7
ETH4_1_P: ETH4.4 U0.65 | length 658.2
  Top Layer w8: U0.65 2886.25,1087.27 2903.75,1069.77 2903.75,1051.34 3039.79,915.3 3145.5,915.3 3197.08,863.72 3197.08,773.75 3248.96,721.87 3248.96,700.62 3244.28,695.94 3206.16,695.94 ETH4.4
ETH4_2_N: ETH4.6 U0.68 | length 606.9
  Top Layer w8: U0.68 3036.25,1087.27 3018.75,1069.77 3018.75,1057.55 3091,985.3 3204.5,985.3 3310.08,879.72 3310.08,784.58 3315.9,778.76 3315.9,759.71 3305.52,749.34 ETH4.6
ETH4_2_P: ETH4.5 U0.67 | length 593.4
  Top Layer w8: U0.67 2986.25,1087.27 3003.75,1069.77 3003.75,1051.34 3084.79,970.3 3198.29,970.3 3295.08,873.51 3295.08,778.37 3300.9,772.55 3300.9,765.92 3296.21,761.24 3289.58,761.24 ETH4.5
ETH4_3_N: ETH4.9 U0.70 | length 596
  Top Layer w8: U0.70 3136.25,1087.27 3118.75,1069.77 3118.75,1057.55 3131,1045.3 3250.5,1045.3 3412.08,883.72 3412.08,774.48 3410.2,772.6 3410.2,765.97 3414.89,761.29 3421.51,761.29 ETH4.9
ETH4_3_P: ETH4.8 U0.69 | length 611.5
  Top Layer w8: U0.69 3086.25,1087.27 3103.75,1069.77 3103.75,1051.34 3124.79,1030.3 3244.29,1030.3 3397.08,877.51 3397.08,780.7 3395.2,778.81 3395.2,759.76 3407.83,747.13 3407.83,697.61 ETH4.8
GND: "DC 9V/12V.2" "DC 9V/12V.3" C0.2 C1.1 C2.2 C3.2 C4.2 C6.2 C7.2 C13.1 C14.2 CEMI.1 CTF.2 CTFT.2 Debug.2 ETH0.10 ETH1.10 ETH2.10 ETH3.10 ETH4.10 J1.4 J2.4 J2.7 P1.11 P1.12 P2.1 P3.3 P3.6 REMI.1 TF.6 TF.10 TF.11 TF.12 TF.13 U0.5 U0.6 U0.7 U0.8 U0.19 U0.24 U0.27 U0.44 U0.53 U0.62 U0.92 U0.119 U0.125 U1.2 U1.4 U2.2 U2.4 WPS.2 | length 821.7
  Bottom Layer w10: ETH0.10@885,695.8 ETH0.10
  Bottom Layer w20: ETH0.10@885,695.8 v1(885,860) ; ETH1.10@1540,695.8 v1(1540,860) ; ETH2.10@2195,695.8 v1(2195,860) ; ETH3.10@2850,695.8 v1(2850,860) ; ETH4.10@3505.02,695.8 v1(3505.02,860)
  other v1: 310,280 60,350 3860,350 3685,395 3815,575 65,695 295,720 3710,765 2500,860 3130,870 1200,875 2050,875 1400,885 1950,885 2700,885 3350,885 740,895 2595,900 1690,905 1865,905 2285,920 1015,925 2830,925 3205,925 1335,935 1780,945 3515,960 1285,980 1640,980 2935,980 175,985 3250,985 3805,985 2750,995 3380,1000 1190,1005 2505,1005 695,1010 1565,1010 3110,1010 2162.31,1013.55 1835,1015 1960,1015 2615,1015 1475,1020 65,1025 2065,1030 2965.5,1050.3 1330,1080 3295,1085 3690,1105 920,1125 710,1135 1150,1155 510,1160 1365,1185 890,1205 1715,1260 2190,1260 2665,1260 3070,1260 1210,1310 3740,1315 895,1320 280,1335 1470,1385 75,1390 1155,1410 765,1425 885,1430 445,1435 1195,1510 1715,1535 2190,1535 2665,1535 3070,1535 415,1560 3365,1575 795,1595 3640,1600 930,1605 1180,1635 3870,1670 100,1685 420,1685 795,1705 1475,1705 935,1720 3440,1750 625,1795 1165,1795 795,1825 1715,1885 2190,1885 2665,1885 3070,1885 935,1890 655,1905 1170,1915 3835,2025 570,2030 1200,2035 3430,2045 1025,2050 670,2055 835,2065 380,2130 3555,2130 895,2150 1215,2180 1070,2200 3460,2220 3835,2245 1705,2250 2180,2250 2655,2250 3060,2250 3360,2320 625,2325 1135,2360 860,2375 380,2410 3450,2460 550,2485 2260,2505 2040,2510 3800,2510 1605,2545 2415,2555 2590,2560 3045,2570 3555,2590 2045,2600 2170,2600 615,2605 435,2610 3590,2670 1970,2675 3160,2685 3375,2690 790,2725 2955,2725 2030,2730 2120,2740 1775,2745 2340,2745 2190,2755 2695,2770 3485,2775 2450,2790 2280,2795 1105,2835 2620,2845 2990,2850 1845,2870 2375,2870 3385,2875 3565,2880 1965,2895 2025,2895 2780,2895 3870,2895 2545,2915 3130,2925 1780,2935 1474.8,2947.3 2860,2975 3460,2980 1715,3005 3240,3040 1120,3135 2935,3140 3470,3160 3830,3165 1220,3170 2375,3170 1710,3190 2650,3195 800,3205 3285,3210 75,3220 2035,3225 2840,3260 3020,3260 305,3285 980,3290 1135,3290 2245,3330 2470,3375 1310,3380 1920,3410 3050,3430 135,3435 1500,3435 1180,3450 3190,3465 2610,3475 945,3495 3805,3515 2310,3535 2875,3540 3190,3575 1335,3600 75,3620 1545,3640 3580,3645 2600,3650 2395,3670 1085,3675 2975.5,3700.3 1480,3715 2770,3715 420,3820 3480,3825
  other v2: 2735.5,1115.3 1840.5,1120.3 1320.5,1635.3 1320.5,1785.3 3255.5,2285.3 1315.5,2585.3 1315.5,2635.3 1315.5,2685.3 1315.5,2735.3 2185.5,3050.3 2485.5,3050.3
  other v3: 230.5,515.3 234.85,817.36 328.22,1057.87 984.06,1057.83 249.49,1479.49 187.82,1854.69 2830.5,2005.3 1480.83,2036.51 247.1,2193.14 1484.97,2379.98 2825.5,2585.3 2725.5,2660.3 2770.5,2660.3 2507.13,2665.51 1545.5,2695.17
  other v6: 2289.06,1082.83
GPIO0: P3.5 U0.104 | length 897.3
  Top Layer w10: U0.104 3283.22,2872.58 3323.22,2872.58 3620.5,2575.3 3695.5,2575.3 3745.5,2625.3 3745.5,2785.3 P3.5
I2C_CLK: P1.13 U0.96 | length 1525.4
  Bottom Layer w10: P1.13 2240.5,3505.3 3255.5,2490.3 v2(3255.5,2485.3)
I2C_SDA: P1.14 U0.97 | length 1575.4
  Bottom Layer w10: P1.14 3255.5,2675.3 v1(3255.5,2535.3)
ND_ALE: TF.3 U0.138 | length 844
  Bottom Layer w10: v2(1535.5,3055.3) 1537.03,3053.77 1537.03,3049.33 1801.32,2785.05 2115.75,2785.05 2198.57,2702.23 2200.07,2702.23 2214.76,2687.54 TF.3
ND_CLE: TF.9 U0.137 | length 1361.1
  Bottom Layer w10: v2(1585.5,3055.3) 1825.97,2814.83 2169.76,2814.83 2269.76,2714.83 2269.76,2614.83 2214.76,2559.83 2009.76,2559.83 1923.74,2645.85 TF.9@1923.74,2677.23
ND_D0: TF.7 U0.133 | length 989.6
  Bottom Layer w10: v2(1785.5,3055.3) 1920.97,2919.83 2379.96,2919.83 2612.71,2687.07 TF.7@2612.71,2677.23
ND_D1: TF.8 U0.132 | length 1003.7
  Bottom Layer w10: v2(1835.5,3055.3) 1943.51,2947.29 2416.67,2947.29 2676.89,2687.07 TF.8@2676.89,2677.23
ND_D2: TF.1 U0.131 | length 2991.6
  Bottom Layer w10: v2(1885.5,3055.3) 1965.97,2974.83 2589.76,2974.83 2914.76,2649.83 2914.76,2509.83 2859.76,2454.83 1809.76,2454.83 1749.76,2514.83 1749.76,2604.83 1874.76,2729.83 1979.41,2729.83 2022.16,2687.07 TF.1@2022.16,2677.23
ND_D3: TF.2 U0.130 | length 3277
  Bottom Layer w10: v2(1935.5,3055.3) 1985.97,3004.83 2604.76,3004.83 2959.76,2649.83 2959.76,2509.83 2868,2418.08 1796.51,2418.08 1704.76,2509.83 1704.76,2599.83 1703.9,2600.68 1863.04,2759.83 2047.83,2759.83 2120.59,2687.07 TF.2@2120.59,2677.23
ND_RB_N: RTF.1 U0.134 | length 442.7
  Bottom Layer w10: v2(1735.5,3055.3) 1925.5,2865.3 RTF.1@2099.48,2865.3
NetC0_1: C0.1 ETH0.1 | length 260
  Bottom Layer w15: ETH0.1 C0.1
NetC1_2: C1.2 ETH1.1 | length 261.2
  Bottom Layer w8: ETH1.1 ETH1.1@1093.36,798.15
  Bottom Layer w15: ETH1.1@1093.36,798.15 C1.2
NetC2_1: C2.1 ETH2.1 | length 260.5
  Bottom Layer w8: C2.1 C2.1@1745.5,1054.14
  Bottom Layer w15: ETH2.1 C2.1@1745.5,1054.14
NetC3_1: C3.1 ETH3.1 | length 260.3
  Bottom Layer w8: ETH3.1@2399.86,795.94 ETH3.1
  Bottom Layer w15: ETH3.1@2399.86,795.94 C3.1
NetC4_1: C4.1 ETH4.1 | length 260.1
  Bottom Layer w8: ETH4.1@3055.26,795.56 ETH4.1
  Bottom Layer w15: ETH4.1@3055.26,795.56 C4.1
NetJ1_5: J1.5 J2.10 | length 233.2
  Bottom Layer w10: J1.5 J1.5@489.27,2019.91 ; J2.10@489.27,1796.69 J2.10
  Bottom Layer w15: J2.10@489.27,1796.69 J1.5@489.27,2019.91
NetRTF_2: RTF.2 TF.5 | length 344.6
  Bottom Layer w10: RTF.2 2324.7,2865.3 2409.43,2780.57 2409.43,2679.88 TF.5
RST: P3.7 U0.105 | length 506.8
  Top Layer w10: U0.105 3395.5,2935.3 P3.7
RXD0: Debug.3 P2.2 U0.93 | length 1446.8
  Top Layer w15: U0.93 3280.72,2325.08 3315.72,2325.08 3615.57,2025.23 3615.57,2010.23 3775.5,1850.3 3775.5,1490.3 3625.5,1340.3 P2.2
RXD2: P1.7 U0.11 | length 1498.8
  Bottom Layer w10: v2(1302,2435.3) 1322.43,2435.3 1395.5,2508.38 1395.5,3155.3 1565.5,3325.3 1680.5,3325.3 1940.5,3585.3 P1.7
RXD3: P1.3 U0.13 | length 2029.8
  Top Layer w10: U0.13 1289.28,2348.01 1268.86,2348.01 1180.5,2436.37 1180.5,3345.3 1595.5,3760.3 1764.65,3760.3 1790.5,3734.44 1790.5,3640.3 P1.3
Shells: CEMI.2 ETH0.@355.58,565.38 J2.11 pad.4 REMI.2 | length 1696.7
  Bottom Layer w15: pad.4 122.82,207.18 122.82,514.83 REMI.2 127.35,520.3 127.35,667.8 ; ETH0.@355.58,565.38 253.16,667.8 127.35,667.8 ; J2.11@495.5,1275.3 250.5,1275.3 127.35,1152.15 CEMI.2 127.35,667.8
TXD0: Debug.4 P2.3 U0.94 | length 1375.9
  Top Layer w15: U0.94 3340.5,2385.3 Debug.4
  Bottom Layer w15: P2.3 3625.5,1440.3 3725.5,1540.3 3725.5,2000.3 Debug.4
TXD2: P1.8 U0.10 | length 1554.7
  Bottom Layer w10: v2(1302,2485.3) 1322.43,2485.3 1372.5,2535.38 1372.5,3182.3 1545.5,3355.3 1670.56,3355.3 1894.5,3579.24 1894.5,3644.3 P1.8
TXD3: P1.4 U0.12 | length 1573.3
  Top Layer w10: U0.12 1289.28,2398.01 1263.65,2398.01 1215.5,2446.16 1215.5,3082.08 1513.72,3380.3 1694.5,3561.08 1694.5,3644.3 P1.4
USB2D_N: J1.2 U0.18 | length 908.1
  Top Layer w8: J1.2 593.21,2121.79 624.85,2090.15 624.85,2024.73 712.37,1937.22 822.42,1937.22 988,2102.8 1270.72,2102.8 1288.22,2085.3 U0.18
USB2D_P: J1.3 U0.17 | length 883.5
  Top Layer w8: J1.3 671.95,2121.95 639.85,2089.85 639.85,2030.95 718.58,1952.22 816.21,1952.22 981.79,2117.8 1270.72,2117.8 1288.22,2135.3 U0.17
USB3_SSR_N: J2.5 U0.23 | length 873.2
  Top Layer w8: J2.5@633.3,1376.48 665.17,1408.35 694.31,1408.35 1138.76,1852.8 1270.72,1852.8 1288.22,1835.3 U0.23
USB3_SSR_P: J2.6 U0.22 | length 873.2
  Top Layer w8: J2.6@633.3,1455.22 665.17,1423.35 688.1,1423.35 1132.55,1867.8 1270.72,1867.8 1288.22,1885.3 U0.22
USB3_SST_N: J2.8 U0.21 | length 816.8
  Top Layer w8: J2.8@633.3,1612.7 665.17,1644.57 821.04,1644.57 1129.26,1952.8 1270.72,1952.8 1288.22,1935.3 U0.21
USB3_SST_P: J2.9 U0.20 | length 816.8
  Top Layer w8: J2.9@633.3,1691.44 665.17,1659.57 814.82,1659.57 1123.05,1967.8 1270.72,1967.8 1288.22,1985.3 U0.20
USB3D_N: J2.2 U0.26 | length 1228.5
  Top Layer w8: J2.2@574.24,1573.33 566.36,1565.44 566.36,1546.85 560.97,1541.46 548.13,1541.46 510.5,1503.83 510.5,1375.3 585.5,1300.3 710.5,1300.3 1113,1702.8 1270.72,1702.8 1288.22,1685.3 U0.26
USB3D_P: J2.3 U0.25 | length 1178.8
  Top Layer w8: J2.3@574.24,1494.59 566.36,1502.47 566.36,1521.07 560.97,1526.46 554.35,1526.46 525.5,1497.62 525.5,1381.51 591.72,1315.3 704.29,1315.3 1106.79,1717.8 1270.72,1717.8 1288.22,1735.3 U0.25
VCC: C13.2 CTF.1 CTFT.1 P1.2 P3.4 TF.4 U0.1 U0.2 U0.3 U0.4 U1.1 | length 366.3
  Bottom Layer w150: U1.1 1136.43,2984.37 v2(1285.5,2835.3)
  other v2: 1285.5,2785.3 1315.5,2785.3 1315.5,2835.3 1285.5,2885.3 1315.5,2885.3 1285.5,2935.3 1315.5,2935.3
  other v3: 1466.34,2145.19 1465.3,2490.73 2315.5,2665.3 1540.5,2805.17
  other v5: 1130,2930
WPS: U0.112 WPS.1 | length 812.4
  Top Layer w10: U0.112 2848.97,3082.27 2848.97,3174.38 3272.82,3598.22 WPS.1
pads on no net: Debug.1 Debug.5 Debug.6 ETH0.11 ETH0.12 ETH0.13 ETH0.14 ETH0.@435.5,445.3 ETH0.@885.5,445.3 ETH0.@965.43,565.38 ETH1. ETH1.11 ETH1.12 ETH1.13 ETH1.14 ETH2. ETH2.11 ETH2.12 ETH2.13 ETH2.14 ETH3. ETH3.11 ETH3.12 ETH3.13 ETH3.14 ETH4. ETH4.11 ETH4.12 ETH4.13 ETH4.14 J1.6 J1.7 J1.8 P1.5 P1.6 P1.9 P1.10 TF.14 TF.15 U0.9 U0.14 U0.15 U0.16 U0.71 U0.72 U0.73 U0.74 U0.75 U0.76 U0.77 U0.78 U0.79 U0.80 U0.81 U0.82 U0.83 U0.84 U0.85 U0.86 U0.87 U0.88 U0.89 U0.90 U0.91 U0.95 U0.98 U0.99 U0.100 U0.101 U0.102 U0.103 U0.106 U0.107 U0.108 U0.109 U0.110 U0.111 U0.113 U0.114 U0.115 U0.116 U0.117 U0.118 U0.120 U0.121 U0.122 U0.123 U0.124 U0.126 U0.127 U0.128 U0.129 U0.135 U0.136 U0.139 U0.140
copper on no net:
  other v7: 1915.75,2541.28
  other v8: 2743.3,2540.89

## Polygon pours and split planes (outlines as drawn)
GND on Top Layer "NONET_L-01_P-001" (solid, remove dead copper, pour order 1): 340,0 0,0 0,4010 50,4060 4035,4060 4035,40 3995,0 3990,5 3600,5 3600,845 340,845
GND on Bottom Layer "NONET_L-01_P-001" (solid, remove dead copper, pour order 2): 340,0 0,0 0,4010 50,4060 4035,4060 4035,40 3995,0 3990,5 3600,5 3600,845 340,845
GND on GNDL (split plane): 3845.65,3919.6 3853.65,3918.42 3861.5,3916.45 3869.12,3913.72 3876.43,3910.27 3883.37,3906.11 3889.86,3901.29 3895.86,3895.86 3901.29,3889.86 3906.11,3883.37 3910.27,3876.43 3913.72,3869.12 3916.45,3861.5 3918.42,3853.65 3919.6,3845.65 3919.97,3838.22 3919.9,3837.57 3919.9,107.43 3919.97,106.78 3919.6,99.35 3918.42,91.35 3916.45,83.5 3913.72,75.88 3910.27,68.57 3906.11,61.63 3901.29,55.14 3895.86,49.14 3889.86,43.71 3883.37,38.89 3876.43,34.73 3869.12,31.27 3861.5,28.55 3853.65,26.58 3845.65,25.4 3838.22,25.03 3837.57,25.1 3600,25.1 3600,844.35 341.96,844.35 341.96,25.1 107.43,25.1 106.78,25.03 99.35,25.4 91.35,26.58 83.5,28.55 75.88,31.27 68.57,34.73 61.63,38.89 55.14,43.71 49.14,49.14 43.71,55.14 38.89,61.63 34.73,68.57 31.27,75.88 28.55,83.5 26.58,91.35 25.4,99.35 25.03,106.78 25.1,107.43 25.1,3837.57 25.03,3838.22 25.4,3845.65 26.58,3853.65 28.55,3861.5 31.27,3869.12 34.73,3876.43 38.89,3883.37 43.71,3889.86 49.14,3895.86 55.14,3901.29 61.63,3906.11 68.57,3910.27 75.88,3913.72 83.5,3916.45 91.35,3918.42 99.35,3919.6 106.78,3919.97 107.43,3919.9 3837.57,3919.9 3838.22,3919.97
+5 on PWRL (split plane): 1685.41,3623.19 1685.41,3540.3 1685.79,3538.35 1686.9,3536.69 1688.55,3535.59 1690.5,3535.2 3593.39,3535.2 3715.41,3413.19 3715.41,3185.3 3715.41,3147.41 3693.39,3125.4 1260.5,3125.4 1258.55,3125.01 1256.9,3123.9 881.9,2748.9 880.79,2747.25 880.41,2745.3 880.41,1487.41 703.39,1310.4 582.62,1310.4 474.11,1418.9 472.45,1420.01 470.5,1420.4 212.62,1420.4 145.6,1487.41 145.6,2608.19 689.11,3151.69 1177.62,3640.2 1668.39,3640.2
VCC on PWRL (split plane): 3845.65,3919.6 3853.65,3918.42 3861.5,3916.45 3869.12,3913.72 3876.43,3910.27 3883.37,3906.11 3889.86,3901.29 3895.86,3895.86 3901.29,3889.86 3906.11,3883.37 3910.27,3876.43 3913.72,3869.12 3916.45,3861.5 3918.42,3853.65 3919.6,3845.65 3919.97,3838.22 3919.9,3837.57 3919.9,107.43 3919.97,106.78 3919.6,99.35 3918.42,91.35 3916.45,83.5 3913.72,75.88 3910.27,68.57 3906.11,61.63 3901.29,55.14 3895.86,49.14 3889.86,43.71 3883.37,38.89 3876.43,34.73 3869.12,31.27 3861.5,28.55 3853.65,26.58 3845.65,25.4 3838.22,25.03 3837.57,25.1 3600,25.1 3600,844.35 341.96,844.35 341.96,25.1 107.43,25.1 106.78,25.03 99.35,25.4 91.35,26.58 83.5,28.55 75.88,31.27 68.57,34.73 61.63,38.89 55.14,43.71 49.14,49.14 43.71,55.14 38.89,61.63 34.73,68.57 31.27,75.88 28.55,83.5 26.58,91.35 25.4,99.35 25.03,106.78 25.1,107.43 25.1,3837.57 25.03,3838.22 25.4,3845.65 26.58,3853.65 28.55,3861.5 31.27,3869.12 34.73,3876.43 38.89,3883.37 43.71,3889.86 49.14,3895.86 55.14,3901.29 61.63,3906.11 68.57,3910.27 75.88,3913.72 83.5,3916.45 91.35,3918.42 99.35,3919.6 106.78,3919.97 107.43,3919.9 3837.57,3919.9 3838.22,3919.97

## Keep-outs
Keep-Out Layer:
  the board outline again, w10

## Other copper
GNDL (plane layer: these items are gaps in the copper):
  rectangle: 341.96,0 3600,844.35
PWRL (plane layer: these items are gaps in the copper):
  rectangle: 341.96,0 3600,844.35
  lines w10: 140.5,1485.3 140.5,2610.3 685.5,3155.3 1175.5,3645.3 1670.5,3645.3 1690.5,3625.3 1690.5,3540.3 3285.5,3540.3 3595.5,3540.3 3720.5,3415.3 3720.5,3185.3 3720.5,3145.3 3695.5,3120.3 3570.5,3120.3 1260.5,3120.3 885.5,2745.3 885.5,1485.3 705.5,1305.3 580.5,1305.3 470.5,1415.3 210.5,1415.3 140.5,1485.3 ; 1590.5,3450.3 1590.5,3450.3

## Silkscreen, mask and mechanical layers (free items; w line width, h text height)
Top Overlay:
  text "5V MOD" at 405.5,2750.3 h60
  text "TX" at 3810,1415 h50
  text "RX" at 3810,1315 h50
  text "GND" at 3760,1215 h50
Bottom Overlay:
  text "3V3 MOD" at 770.5,2750.3 h60
Mechanical 1:
  the board outline again, w10

## Text inside footprints (layer, text, board x,y; h text height)
Designator44: Top Overlay "JLCJLCJLCJLC" at 3722.63,1813.17 h39.37 r90
Designator45: Top Overlay "Designed By CYJ" at 990.5,2010.3 h60 r270
Designator46: Top Overlay "Designed By CYJ" at 3406.58,3387.46 h60 r180